# Altium PCB EE4951_BPM_REVA.PcbDoc
Units mil, origin at the board's own origin, x right, y up, seen from the top; angles counter-clockwise.
Board outline 2000 x 1500 mil, 4 copper layers (Top Layer, Mid Layer 1, Ground Plane, Bottom Layer), stack 30.634 mil thick; 66 components, 58 nets, 312 pads, 0 vias.
Unrouted connection lines stored in the file: 77.
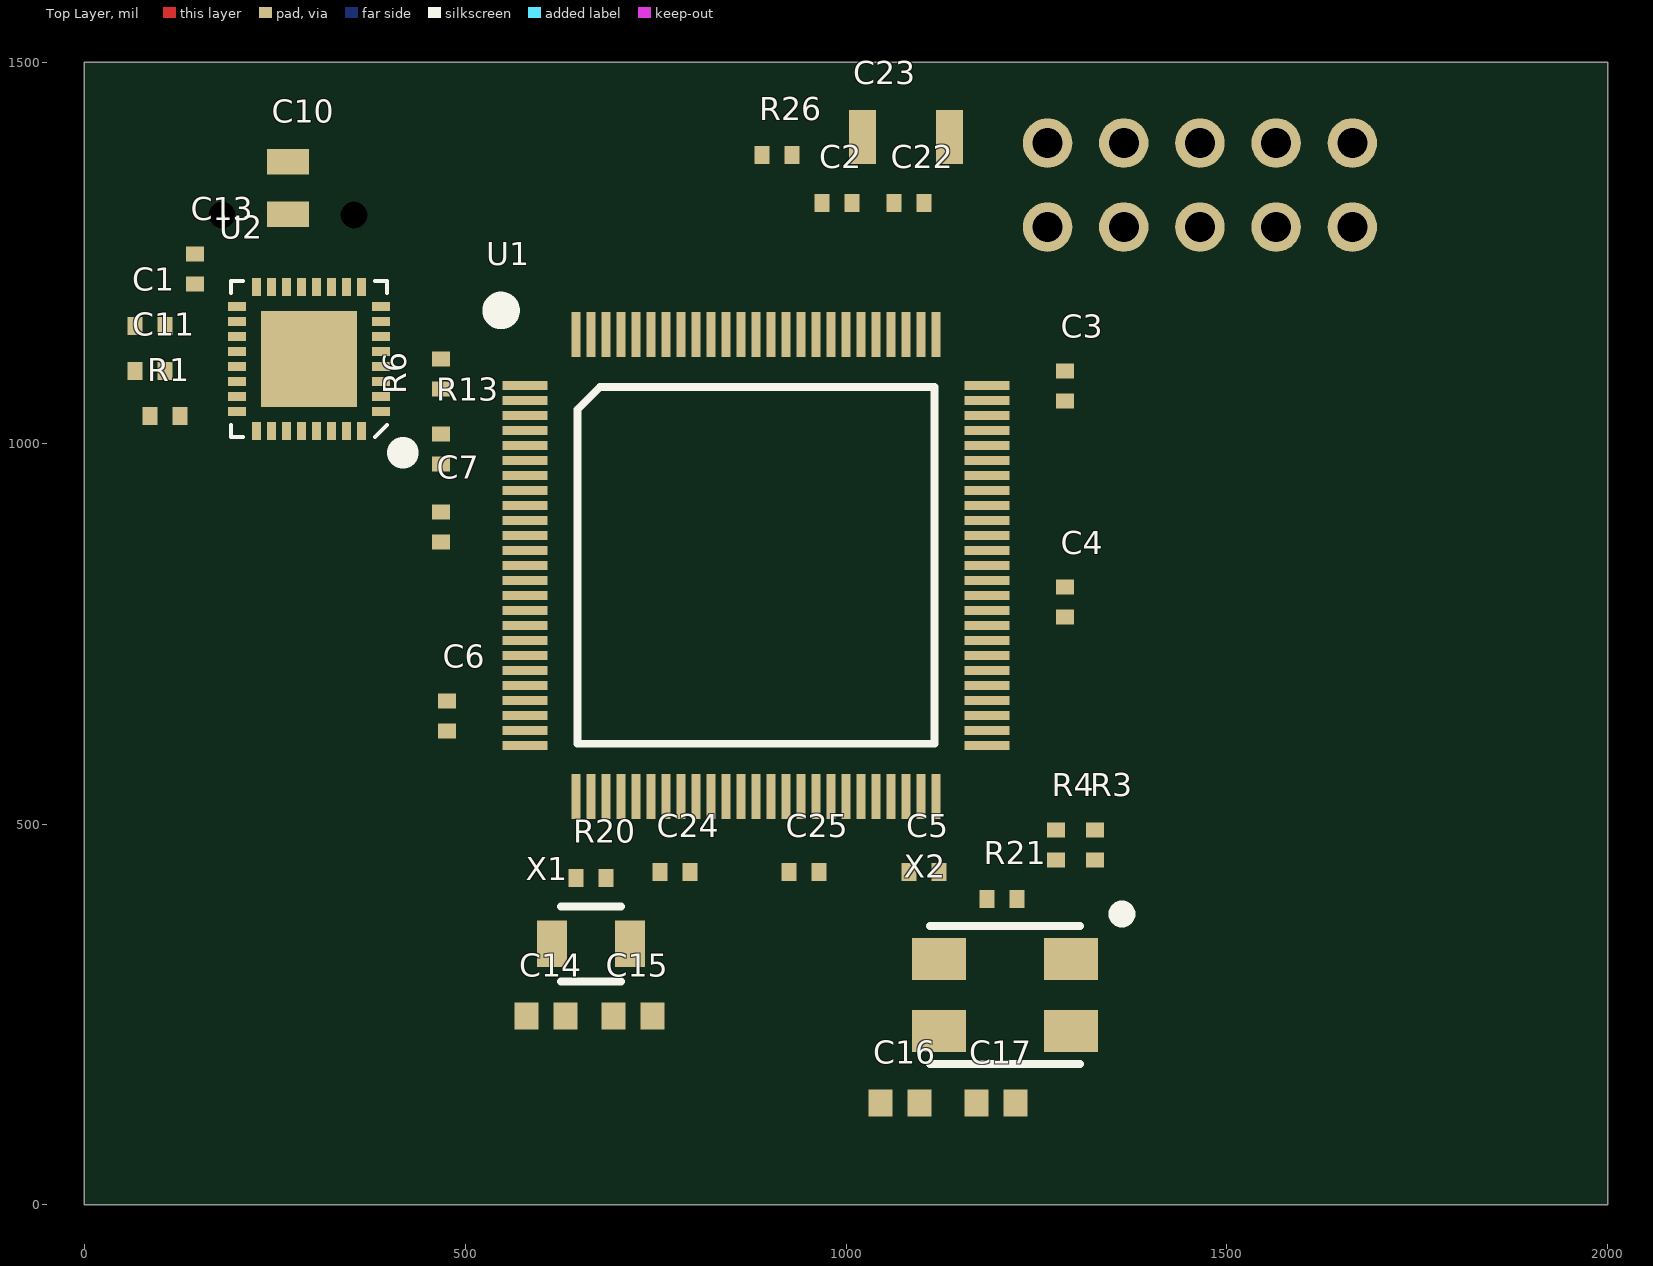
[diagram p0: Top Layer view]
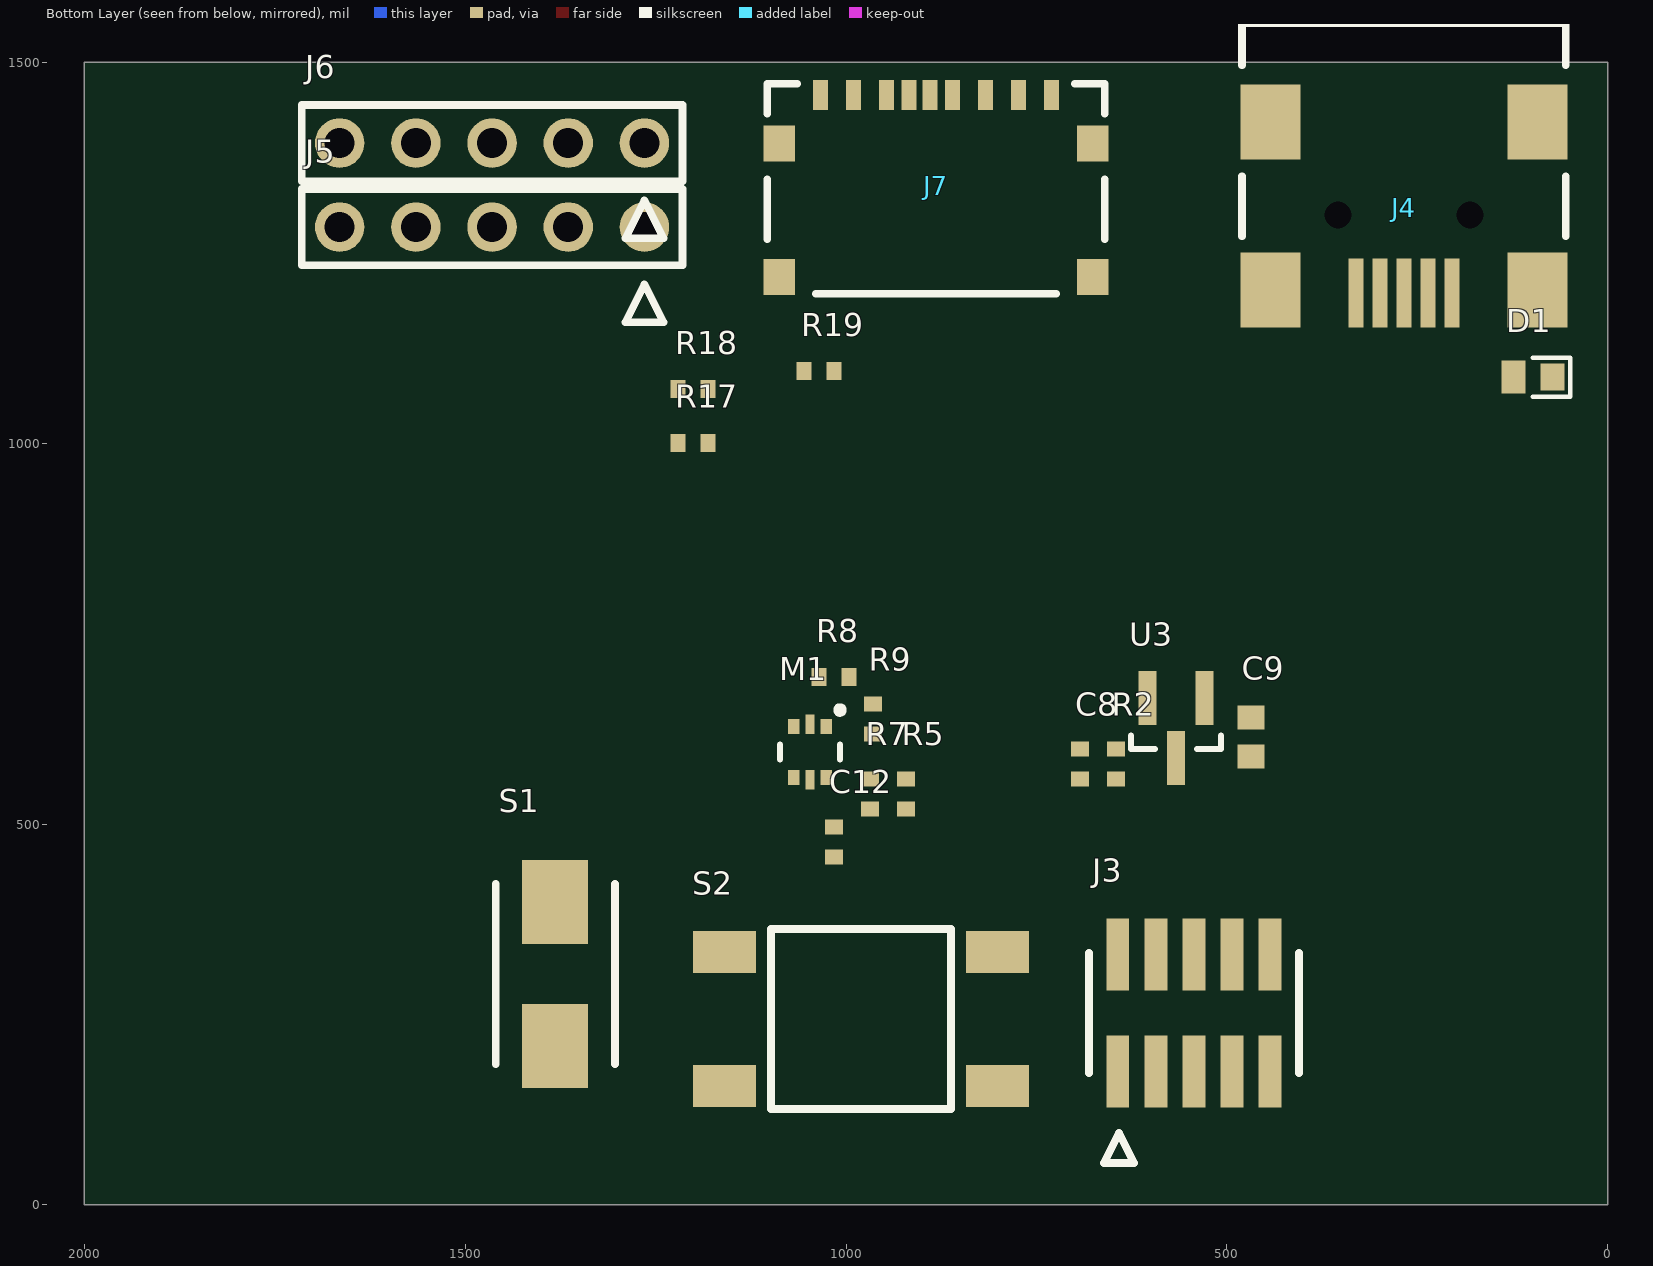
[diagram p1: Bottom Layer view, seen from below]
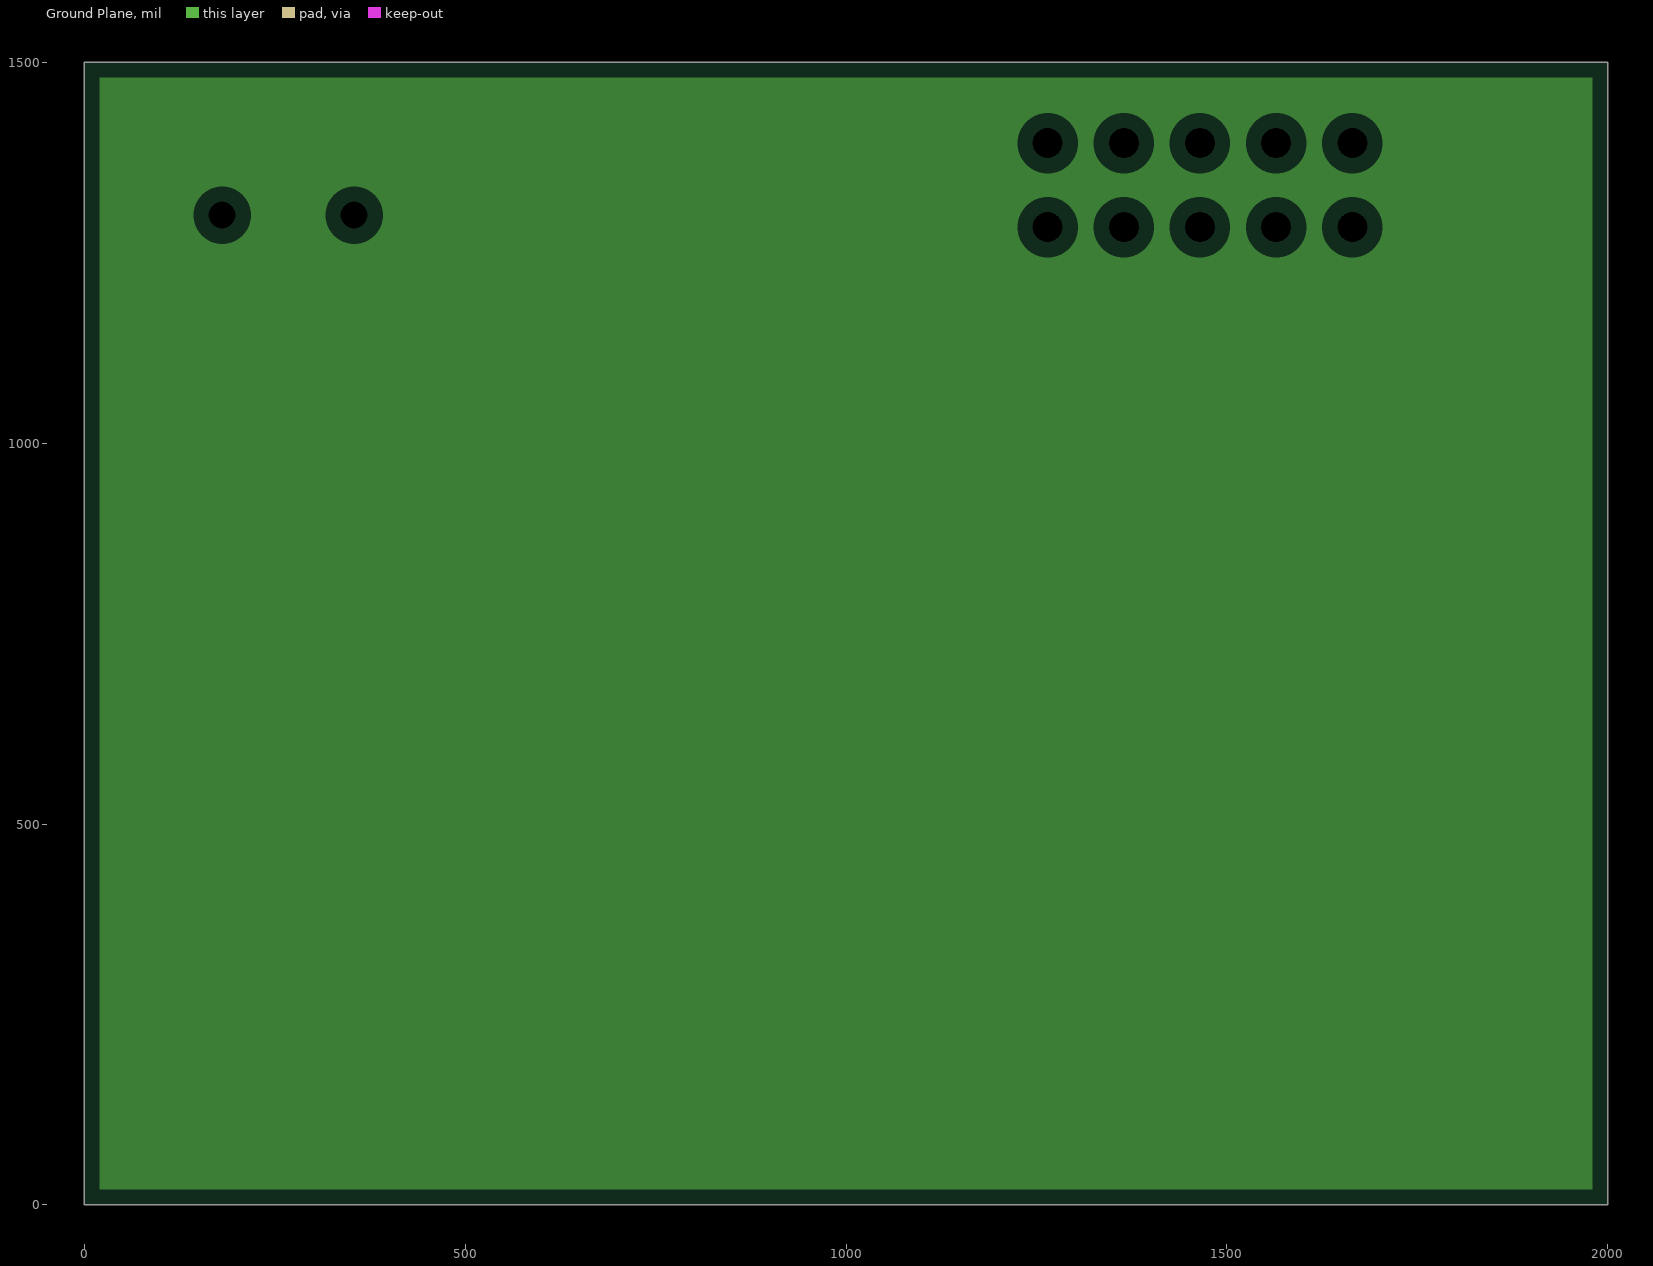
[diagram p2: Ground Plane, clearances drawn from the general rule]

## Layer stack, top to bottom
Top Solder: solder mask 0.4, Solder Resist, Dk 3.5
Top Layer: signal copper 1.4
Dielectric 1: core 10, FR-4, Dk 4.2
Mid Layer 1: signal copper 1.417
Dielectric 3: prepreg 5, Dk 4.2
Ground Plane: plane copper 1.417
Dielectric 2: core 10, Dk 4.2
Bottom Layer: signal copper 1.4
Bottom Solder: solder mask 0.4, Solder Resist, Dk 3.5

## Board outline
0,0 0,1500 2000,1500 2000,0

## Design rules (kind name [scope] priority, off if disabled: settings)
Clearance [All] p1: gap=6
DiffPairsRouting [All] p1: maxlimit=10 minlimit=10 mostfreqgap=10 toplayer_minwidth=15 toplayer_maxwidth=15 toplayer_prefwidth=15 midlayer1_minwidth=15 midlayer1_maxwidth=15 midlayer1_prefwidth=15 bottomlayer_minwidth=15 bottomlayer_maxwidth=15 bottomlayer_prefwidth=15 maxuncoupledlength=500
HoleSize [All] p1: absolutevalues=TRUE maxlimit=100 minlimit=15 maxpercent=80.000 minpercent=20.000
PlaneClearance [All] p1: clearance=20
PlaneConnect [All] p1: planeconnectstyle=Relief reliefexpansion=20 reliefentries=4 reliefconductorwidth=10 reliefairgap=10
PolygonConnect [All] p1: connectstyle=Relief reliefconductorwidth=10 reliefentries=4 polygonreliefangle="90 Angle" airgapwidth=10
RoutingVias [All] p1: holewidth=28 width=50 viastyle="Through Hole" minholewidth=28 minwidth=50 maxholewidth=28 maxwidth=50
SolderMaskExpansion [All] p1: expansion=4
Width [All] p1: maxlimit=100 minlimit=6 preferedwidth=10 midlayer1_minwidth=10 midlayer1_maxwidth=10 minimp=50.000000 maximp=50.000000 favimp=50.000000
26 further rules are at their usual default settings.

## Classes and differential pairs
component class Connectors: C1 C22 C23 D1 J1 J2 J3 J4 J7 R1 R26
component class Microcontroller: C2 C3 C4 C5 C6 C7 C8 C9 C10 C11 C12 C13 C14 C15 C16 C17 C24 C25 D2 D3 J5 J6 M1 M2 R2 R3 R4 R5 R6 R7 R8 R9 R13 R17 R18 R19 R20 R21 R27 R28 S1 S2 U1 U2 U3 X1 X2
component class "Voltage Measurement": C18 C19 C20 C21 R22 R23 R24 U4
differential pair OSC8M: +OSC8M_P -OSC8M_N
differential pair OSC32K: +OSC32K_P -OSC32K_N
differential pair USBD: +USBD_P -USBD_N

## Components (designator, comment, footprint, x,y, rotation, side; value= is the part's Value field where it differs from the comment)
C1 "10nF" CAP0402R 86.61,1153.54 r180 top
C2 "0.1uF" CAP0402R 988.19,1314.96 r0 top
C3 "0.1uF" CAP0402R 1287.4,1074.8 r270 top
C4 "0.1uF" CAP0402R 1287.4,791.34 r270 top
C5 "0.1uF" CAP0402R 1102.36,437.01 r0 top
C6 "0.1uF" CAP0402R 476.38,641.73 r270 top
C7 "0.1uF" CAP0402R 468.5,889.76 r270 top
C8 "1nF" CAP0402R 692.91,578.74 r270 bottom
C9 "1uF" CAP0603R 468.5,614.17 r270 bottom
C10 "4.7uF" CAP0805R 267.72,1334.65 r90 top
C11 "0.1uF" CAP0402R 86.61,1094.49 r180 top
C12 "1nF" CAP0402R 1015.75,476.38 r270 bottom
C13 "0.1uF" CAP0402R 145.67,1228.35 r270 top
C14 "25pF" CAP0603R 606.3,248.03 r180 top
C15 "25pF" CAP0603R 720.47,248.03 r0 top
C16 "36pF" CAP0603R 1070.87,133.86 r180 top
C17 "36pF" CAP0603R 1196.85,133.86 r0 top
C18 "0.1uF" CAP0402R 4901.57,1661.42 r180 top
C19 "15pF" CAP0402R 5251.97,1767.72 r90 top
C20 "15pF" CAP0402R 5039.37,1669.29 r180 top
C21 "10pF" CAP0402R 5157.48,1779.53 r270 top
C22 "0.1uF" CAP0402R 1082.68,1314.96 r0 top
C23 "10uF" CAP1206R 1078.74,1401.57 r180 top
C24 "0.1uF" CAP0402R 775.59,437.01 r0 top
C25 "0.1uF" CAP0402R 944.88,437.01 r0 top
D1 "LTST-S270KGKT" "LED Green 0603" 98.43,1086.61 r180 bottom
D2 "LTST-S270KGKT" "LED Green 0603" 5035.43,2779.53 r90 top
D3 "LTST-S270KGKT" "LED Green 0603" 5118.11,2779.53 r90 top
J1 "39-29-3026" "1x2 MicroFit" 5602.36,507.87 r90 top
J2 "39-29-3026" "1x2 MicroFit" 5255.91,480.32 r90 top
J3 "20021121-00010C4LF" "2x5 JTAG Header" 543.31,251.97 r180 bottom
J4 "1734035-4" "USB MINI-B 1734035-4" 267.72,1196.85 r270 bottom
J5 "1x5 Header" "1x5 Header" 1464.57,1283.46 r0 bottom
J6 "1x5 Header" "1x5 Header" 1464.57,1393.7 r0 bottom
J7 "Micro SD Connector" MICROSD_1050270001 881.89,1456.69 r0 bottom
M1 "NX3020NAKV,115" SOT666-6N 1047.24,594.49 r270 bottom
M2 "NX3020NAKV,115" SOT666-6N 4913.37,2779.53 r0 top
R1 "300R" RES0402R 106.3,1035.43 r180 top
R2 "100k" RES0402R 645.67,578.74 r90 bottom
R3 "10k" RES0402R 1326.77,472.44 r90 top
R4 "100R" RES0402R 1275.59,472.44 r90 top
R5 "1k" RES0402R 921.26,539.37 r270 bottom
R6 "100R" RES0402R 468.5,1090.55 r270 top
R7 "100R" RES0402R 968.5,539.37 r90 bottom
R8 "100R" RES0402R 1015.75,692.91 r0 bottom
R9 "10k" RES0402R 964.57,637.8 r90 bottom
R13 "100R" RES0402R 468.5,992.13 r90 top
R17 "220R" RES0402R 1200.79,1000 r0 bottom
R18 "220R" RES0402R 1200.79,1070.87 r0 bottom
R19 "220R" RES0402R 1035.43,1094.49 r180 bottom
R20 "1MEG" RES0402R 665.35,429.13 r180 top
R21 "1MEG" RES0402R 1204.72,401.57 r180 top
R22 "220k" RES0603R 4964.57,1799.21 r90 top
R23 "220R" RES0603R 5251.97,1925.2 r0 top
R24 "30k" RES0603R 5074.8,1787.4 r90 top
R26 "100R" RES0402R 909.45,1377.95 r180 top
R27 "220R" RES0402R 5196.85,2779.53 r90 top
R28 "220R" RES0402R 5255.91,2779.53 r90 top
S1 "147873-1" TECONN_14783-1 1381.89,303.15 r90 bottom
S2 "#NAME?" TECONN_1571563 980.32,244.09 r90 bottom
U1 "MK22FN512VLL12" "LQFP100 0.5mm 14mmx14mm" 881.89,839.37 r0 top
U2 "FT232RQ-REEL" QFN32 295.28,1110.24 r180 top
U3 "MAX6103EUR+T" SOT23-3M 566.93,625.98 r270 bottom
U4 "MAX9618AXA+T" SC70 4791.34,1799.21 r0 top
X1 "32.768kHz" ST3215SB32768H5HPWAA 665.35,342.52 r180 top
X2 "8MHz" ABMM2-8.000MHZ-E2-T 1208.66,275.59 r180 top

## Footprints (in the part's own frame and the unit in brackets; to place one, negate y for a bottom-side part, rotate by r counter-clockwise, add the part's x,y. Pads: shape width x height; smd on the part's side, far side on the other; paste and mask are expansions set on the pad)
"1x2 MicroFit" [mm] "1x2 Molex MicroFit"
  rect 2.2x2.2 hole 1.4 mask+0.102: 1(-2.75,0)
  round 2.2 hole 1.4 mask+0.102: 2(2.75,0)
  silkscreen extent -4.8,-2.7 4.8,2.7, body extent -4.97,-3.1 6.03,3.1, height 12.8
"1x5 Header" [mm]
  round 1.65 hole 1 mask+0.102: 1(-5.08,0) 2(-2.54,0) 3(0,0) 4(2.54,0) 5(5.08,0)
  silkscreen extent -6.35,-1.27 6.35,3.17, body extent -6.35,-1.27 6.35,1.27, height 18.71
"2x5 JTAG Header" [mm]
  rect 0.76x2.4 smd: 1(-2.54,-1.95) 2(-2.54,1.95) 3(-1.27,-1.95) 4(-1.27,1.95) 5(0,-1.95) 6(0,1.95) 7(1.27,-1.95) 8(1.27,1.95) 9(2.54,-1.95) 10(2.54,1.95)
  silkscreen extent -3.5,-5 3.5,2, body extent -3.17,-2.8 3.18,2.7, height 4.5
ABMM2-8.000MHZ-E2-T [mm]
  rect 1.8x1.4 smd: 1(-2.2,-1.2) 2(2.2,-1.2) 3(2.2,1.2) 4(-2.2,1.2)
  silkscreen extent -4.1,-2.9 2.5,2.3, body extent -3.03,-1.83 3.03,1.83, height 1.2
CAP0402R [mm] "Capacitor 0402 reflow soldering"
  rect 0.5x0.6 smd: 1(-0.5,0) 2(0.5,0)
  body extent -0.5,-0.3 0.5,0.3, height 0.2
CAP0603R [mm] "capacitor 0603 reflow soldering"
  rect 0.8x0.9 smd: 1(-0.65,0) 2(0.65,0)
  body extent -0.8,-0.4 0.8,0.4, height 0.3
CAP0805R [mm] "capacitor 0805 reflow soldering"
  rect 0.85x1.4 smd: 1(-0.875,0) 2(0.875,0)
  body extent -1,-0.63 1,0.62, height 0.78
CAP1206R [mm] "capacitor 1206 reflow soldering"
  rect 0.9x1.8 smd: 1(-1.45,0) 2(1.45,0)
  body extent -1.6,-0.8 1.6,0.8, height 1
"LED Green 0603" [mm] "LED Green 0603"
  rect 0.8x0.9 smd: 1(0.65,0)
  rect 0.8x1.1 smd: 2(-0.65,0)
  silkscreen extent 0,-0.65 1.25,0.65, body extent -0.8,-0.4 0.8,0.4, height 0.3
"LQFP100 0.5mm 14mmx14mm" [mm]
  rect 1.5x0.3 smd: 1(-7.7,6) 2(-7.7,5.5) 3(-7.7,5) 4(-7.7,4.5) 5(-7.7,4) 6(-7.7,3.5) 7(-7.7,3) 8(-7.7,2.5) 9(-7.7,2) 10(-7.7,1.5) 11(-7.7,1) 12(-7.7,0.5) 13(-7.7,0) 14(-7.7,-0.5) 15(-7.7,-1) 16(-7.7,-1.5) 17(-7.7,-2) 18(-7.7,-2.5) 19(-7.7,-3) 20(-7.7,-3.5) 21(-7.7,-4) 22(-7.7,-4.5) 23(-7.7,-5) 24(-7.7,-5.5) 25(-7.7,-6) 51(7.7,-6) 52(7.7,-5.5) 53(7.7,-5) 54(7.7,-4.5) 55(7.7,-4) 56(7.7,-3.5) 57(7.7,-3) 58(7.7,-2.5) 59(7.7,-2) 60(7.7,-1.5) 61(7.7,-1) 62(7.7,-0.5) 63(7.7,0) 64(7.7,0.5) 65(7.7,1) 66(7.7,1.5) 67(7.7,2) 68(7.7,2.5) 69(7.7,3) 70(7.7,3.5) 71(7.7,4) 72(7.7,4.5) 73(7.7,5) 74(7.7,5.5) 75(7.7,6)
  rect 0.3x1.5 smd: 26(-6,-7.7) 27(-5.5,-7.7) 28(-5,-7.7) 29(-4.5,-7.7) 30(-4,-7.7) 31(-3.5,-7.7) 32(-3,-7.7) 33(-2.5,-7.7) 34(-2,-7.7) 35(-1.5,-7.7) 36(-1,-7.7) 37(-0.5,-7.7) 38(0,-7.7) 39(0.5,-7.7) 40(1,-7.7) 41(1.5,-7.7) 42(2,-7.7) 43(2.5,-7.7) 44(3,-7.7) 45(3.5,-7.7) 46(4,-7.7) 47(4.5,-7.7) 48(5,-7.7) 49(5.5,-7.7) 50(6,-7.7) 76(6,7.7) 77(5.5,7.7) 78(5,7.7) 79(4.5,7.7) 80(4,7.7) 81(3.5,7.7) 82(3,7.7) 83(2.5,7.7) 84(2,7.7) 85(1.5,7.7) 86(1,7.7) 87(0.5,7.7) 88(0,7.7) 89(-0.5,7.7) 90(-1,7.7) 91(-1.5,7.7) 92(-2,7.7) 93(-2.5,7.7) 94(-3,7.7) 95(-3.5,7.7) 96(-4,7.7) 97(-4.5,7.7) 98(-5,7.7) 99(-5.5,7.7) 100(-6,7.7)
  silkscreen extent -8.62,-5.95 5.95,8.62, body extent -8,-8 8,8, height 1.6
MICROSD_1050270001 [mm]
  rect 0.5x1 smd: G1(0.2,0) P1(3.85,0) P2(2.75,0) P3(1.65,0) P4(0.9,0) P5(-0.55,0) P6(-1.65,0) P7(-2.75,0) P8(-3.85,0)
  rect 1.05x1.2 smd: S1(5.225,1.61) S2(5.225,6.06) S3(-5.225,6.06) S4(-5.225,1.61)
  Mechanical 15 keep-out region: -6.125,-0.788 6.125,-0.788 6.125,-8.7 -6.125,-8.7
  silkscreen extent -5.63,-0.38 5.63,6.63, body extent -5.62,-0.37 5.62,6.63, height 1.7
QFN32 [mm]
  rect 3.2x3.2 smd paste-3.2: 0(0,0)
  rect 0.6x0.3 smd: 1(-2.4,1.75) 2(-2.4,1.25) 3(-2.4,0.75) 4(-2.4,0.25) 5(-2.4,-0.25) 6(-2.4,-0.75) 7(-2.4,-1.25) 8(-2.4,-1.75) 17(2.4,-1.75) 18(2.4,-1.25) 19(2.4,-0.75) 20(2.4,-0.25) 21(2.4,0.25) 22(2.4,0.75) 23(2.4,1.25) 24(2.4,1.75)
  rect 0.3x0.6 smd: 9(-1.75,-2.4) 10(-1.25,-2.4) 11(-0.75,-2.4) 12(-0.25,-2.4) 13(0.25,-2.4) 14(0.75,-2.4) 15(1.25,-2.4) 16(1.75,-2.4) 25(1.75,2.4) 26(1.25,2.4) 27(0.75,2.4) 28(0.25,2.4) 29(-0.25,2.4) 30(-0.75,2.4) 31(-1.25,2.4) 32(-1.75,2.4)
  silkscreen extent -3.15,-2.6 2.6,3.15, body extent -2.5,-2.5 2.5,2.5, height 0.85
RES0402R [mm] "resistor 0402 reflow soldering"
  rect 0.5x0.6 smd: 1(-0.5,0) 2(0.5,0)
  body extent -0.5,-0.25 0.5,0.25, height 0.3
RES0603R [mm] "resistor 0603 reflow soldering"
  rect 0.8x0.9 smd: 1(-0.65,0) 2(0.65,0)
  body extent -0.8,-0.4 0.8,0.4, height 0.45
SC70 [mm]
  rect 1.15x0.35 smd: 1(-0.95,0.65) 2(-0.95,0) 3(-0.95,-0.65) 4(0.95,-0.65) 5(0.95,0) 6(0.95,0.65)
  silkscreen extent -1.7,-1.28 0.5,1.65, body extent -1.05,-1 1.05,1, height 0.92
SOT23-3M [mm]
  rect 1.8x0.6 smd: 1(-0.994,0.946) 2(-0.994,-0.954) 3(1.006,-0.004)
  silkscreen extent 0.25,-1.5 0.71,1.5, body extent -1.13,-1.5 1.13,1.5, height 1.18
SOT666-6N [mm] "NXP PMDT670UPE"
  rect 0.5x0.375 smd paste-0.025 mask+0.064: 1(-0.85,0.538) 3(-0.85,-0.538) 4(0.85,-0.538) 6(0.85,0.538)
  rect 0.65x0.3 smd paste-0.025 mask+0.064: 2(-0.925,0) 5(0.925,0)
  silkscreen extent -1.5,-1 0.25,1.1, body extent -0.8,-1 0.8,1, height 0.6
ST3215SB32768H5HPWAA [mm] "32kHz Crystal"
  rect 1x1.55 smd: 1(-1.3,0) 2(1.3,0)
  silkscreen extent -1,-1.25 1,1.25, body extent -1.75,-0.75 1.75,0.75, height 1
TECONN_14783-1 [mm]
  rect 2.8x2.2 smd: 1(-2.4,0) 2(2.4,0)
  silkscreen extent -3,-2 3,1.97, body extent -3.13,-1.75 3.13,1.75, height 4.5
TECONN_1571563 [mm] "SPST_Momentary"
  rect 1.4x2.1 smd mask+0.102: 1(2.24,4.55) 2(2.24,-4.55) 3(-2.24,4.55) 4(-2.24,-4.55)
  silkscreen extent -3,-3 3,3, body extent -3,-4.5 3,4.5, height 4.97
"USB MINI-B 1734035-4" [mm] "USB MINI B FEMALE"
  round 0.1 hole 0.9: 0(-2.6,-2.2) 0(-2.6,2.2)
  rect 2.3x0.5 smd: 1(0,1.6) 2(0,0.8) 3(0,0) 4(0,-0.8) 5(0,-1.6)
  rect 2.5x2 smd: SH1(-5.7,4.45) SH2(-0.1,4.45) SH3(-5.7,-4.45) SH4(-0.1,-4.45)
  silkscreen extent -9,-5.4 -1.9,5.4, body extent -8.5,-4.95 0.75,4.95, height 3.98

## Part data
C1: library part "10nF (0402)"
C2 C3 C4 C5 C6 C7 C11 C13 C18 C22 C24 C25: library part "0.1uF (0402)"
C8 C12: library part "1nF (0402)"
C10: library part "4.7uF (0805)"
C19 C20: library part "15pF (0402)"
C21: library part "10pF (0402)"
D1 D2 D3: library part "LED Green 0603"
J1 J2: library part "1x2 Microfit", "1x2 MicroFit"
J3: library part "2x5 JTAG Header", "2x5 JTAG Header (1.27mm)"
J4: library part "USB Mini-B Female", "USB Mini B Female"
J5 J6: "1x5 Header, 2.52mm pitch"
J7: library part "MICRO_SD 1050270001"
M1 M2: library part NX3020NAKV, "NFET_DUAL_200mA_30v"
R1: library part "300R (0402)"
R2: library part "100k (0402)"
R3 R9: library part "10k (0402)"
R4 R6 R7 R8 R13 R26: library part "100R (0402)"
R5: library part "1k (0402)"
R17 R18 R19 R27 R28: library part "220R (0402)"
R20 R21: library part "1MEG (0402)"
R22: library part "220k 0.1% (0603)"
R23: library part "220R (0603)"
R24: library part "30k 0.1% (0603)"
S1: library part "SPST Momentary Micro", "Micro SPST Momentary Switch"
S2: library part "SPST Momentary", "SPST Momentary Switch"
U1: "32-bit ARM Cortex-M4 Microcontroller"
U2: "UART Interface/Bridge"
U3: "Precision 3v Reference"
U4: library part MAX9618AXA, "Op Amp - 1 Channel Zero Drift"
X1: library part "32kHz Crystal", "32kHz Crystal"
X2: library part "8MHz Crystal", "8MHz Crystal"

## Nets (pads, with @x,y where several pads share a name; then routed paths per layer and width w, separated by ;. In a path a pad name is that pad's centre, name@x,y a point inside that pad or via, vN(x,y) a via of type N, cw(c..) or ccw(c..) an arc to the next point about the centre after c; other vN are vias at no path point)
3.3V: C2.1 C3.1 C4.1 C5.1 C6.1 C7.1 C18.1 C22.1 C23.2 C24.1 C25.1 J3.1 J7.P4 R3.2 R5.2 R27.2 R28.2 U1.8 U1.22 U1.30 U1.40 U1.48 U1.61 U1.75 U1.89 U4.5 U4.6
5V: C9.1 U3.1
ADC_3V_REF: C8.1 R2.2 U1.23 U3.2
DISP_C\S\: J6.2 U1.97
DISP_CLK: J6.4 U1.98
DISP_MISO: J6.3 U1.100
DISP_MOSI: J6.1 U1.99
DUT_ISENSE: U1.54
DUT_ISENSE_RANGE0: M2.2 R17.2
DUT_ISENSE_RANGE1: M2.5 R18.2
DUT_VSENSE: C19.1 R23.2 U1.53
DUT_VSENSE_IN: C21.1 R22.1 R24.2 U4.1
DUT_VSENSE_OUT: C20.1 R23.1 U4.3 U4.4
GND: C1.2 C2.2 C3.2 C4.2 C5.2 C6.2 C7.2 C8.2 C9.2 C10.2 C11.2 C12.2 C13.1 C14.1 C15.1 C16.1 C17.1 C18.2 C19.2 C20.2 C21.2 C22.2 C23.1 C24.2 C25.2 D1.1 J1.2 J3.3 J3.5 J4.5 J4.SH1 J4.SH2 J4.SH3 J4.SH4 J5.5 J6.5 J7.P6 J7.S1 J7.S2 J7.S3 J7.S4 M1.1 M2.1 M2.4 R2.1 R9.1 R24.1 S1.1 S2.3 S2.4 U1.9 U1.24 U1.25 U1.41 U1.49 U1.60 U1.74 U1.88 U2.0 U2.4 U2.17 U2.20 U2.24 U2.26 U3.3 U4.2
JTAG_TCLK: J3.4 U1.34
JTAG_TDI: J3.8 U1.35
JTAG_TDO: J3.6 U1.36
JTAG_TMS: J3.2 U1.37
MCU_RESET: R3.1 R4.1 S1.2
NetD1_2: D1.2 R1.1
NetD2_1: D2.1 M2.6
NetD2_2: D2.2 R27.1
NetD3_1: D3.1 M2.3
NetD3_2: D3.2 R28.1
NetJ2_2: J2.2
NetJ3_10: J3.10
NetJ7_G1: J7.G1 R26.2
NetM1_2: M1.2 R8.2
NetM1_6: M1.6 R5.1 R7.2 S2.1 S2.2
NetR4_2: R4.2 U1.52
NetR6_1: R6.1 U1.1
NetR13_1: R13.1 U2.30
NetR17_1: R17.1 U1.72
NetR18_1: R18.1 U1.73
NetR19_1: R19.1 U1.79
NetR26_1: R26.1 U1.92
OSC8M_N: C16.2 R21.2 U1.50 X2.3
OSC8M_P: C17.2 R21.1 U1.51 X2.1
OSC32K_N: C15.2 R20.1 U1.29 X1.1
OSC32K_P: C14.2 R20.2 U1.28 X1.2
PWR_FAIL_IRQ: U1.38
S\T\A\T\S\_\I\R\Q\: C12.1 R7.1 U1.43
SD_C\S\: J5.2 J7.P2 U1.93
SD_CLK: J5.4 J7.P5 U1.94
SD_MISO: J5.3 J7.P7 U1.96
SD_MOSI: J5.1 J7.P3 U1.95
SELF_3V3_ISENSE: U1.81
SELF_5V_ISENSE: U1.83
SELF_5V_VSENSE: U1.82
STATS_SW_IRQ: R8.1 R9.2
U2_R\E\S\E\T\: R19.2 U2.18
UART1_RX: R13.2 U1.2
UART1_TX: R6.2 U2.2
USB_3V3: C13.2 U2.1 U2.16
USB_5V: C1.1 C10.1 C11.1 J4.1 R1.2 U2.19
USBD_N: J4.2 U2.15
USBD_P: J4.3 U2.14
V_BAT: J1.1 J2.1 R22.2
pads on no net: J3.7 J3.9 J4.0 J4.4 J7.P1 J7.P8 M1.3 M1.4 M1.5 U1.3 U1.4 U1.5 U1.6 U1.7 U1.10 U1.11 U1.12 U1.13 U1.14 U1.15 U1.16 U1.17 U1.18 U1.19 U1.20 U1.21 U1.26 U1.27 U1.31 U1.32 U1.33 U1.39 U1.42 U1.44 U1.45 U1.46 U1.47 U1.55 U1.56 U1.57 U1.58 U1.59 U1.62 U1.63 U1.64 U1.65 U1.66 U1.67 U1.68 U1.69 U1.70 U1.71 U1.76 U1.77 U1.78 U1.80 U1.84 U1.85 U1.86 U1.87 U1.90 U1.91 U2.3 U2.5 U2.6 U2.7 U2.8 U2.9 U2.10 U2.11 U2.12 U2.13 U2.21 U2.22 U2.23 U2.25 U2.27 U2.28 U2.29 U2.31 U2.32 X2.2 X2.4
copper on no net: | length 622
  Top Layer w10: -614.17,1507.87 -614.17,1881.89
  Bottom Layer w10: -763.78,1685.04 -515.75,1685.04

## Polygon pours and split planes (outlines as drawn)
no net on Ground Plane (split plane): 1979.9,20.1 20.1,20.1 20.1,1479.9 1979.9,1479.9

## Silkscreen, mask and mechanical layers (free items; w line width, h text height)
Mechanical 1:
  the board outline again, w10